# Altium PCB PCB2.PcbDoc
Units mm, origin at the board's own origin, x right, y up, seen from the top; angles counter-clockwise.
Board outline 152.4 x 101.6 mm, 2 copper layers (Top Layer, Bottom Layer); 19 components, 15 nets, 64 pads, 0 vias.
Unrouted connection lines stored in the file: 35.
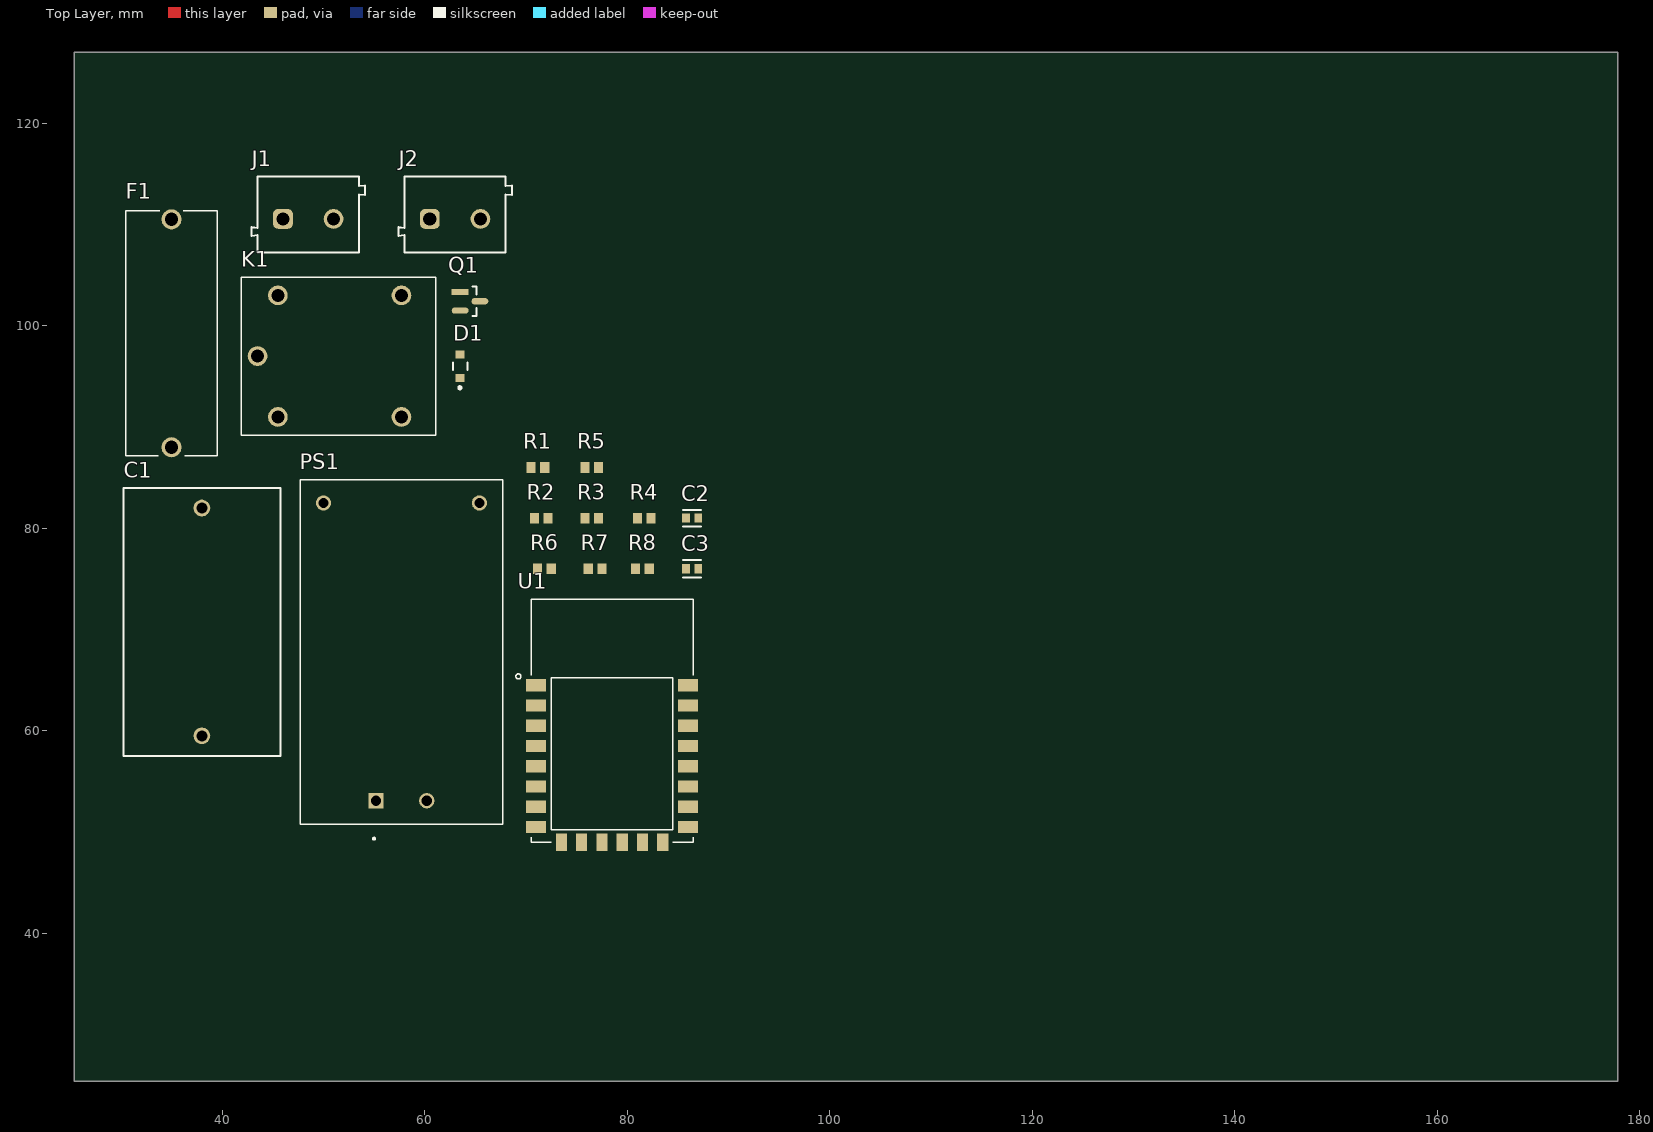
[diagram p0: Top Layer view]
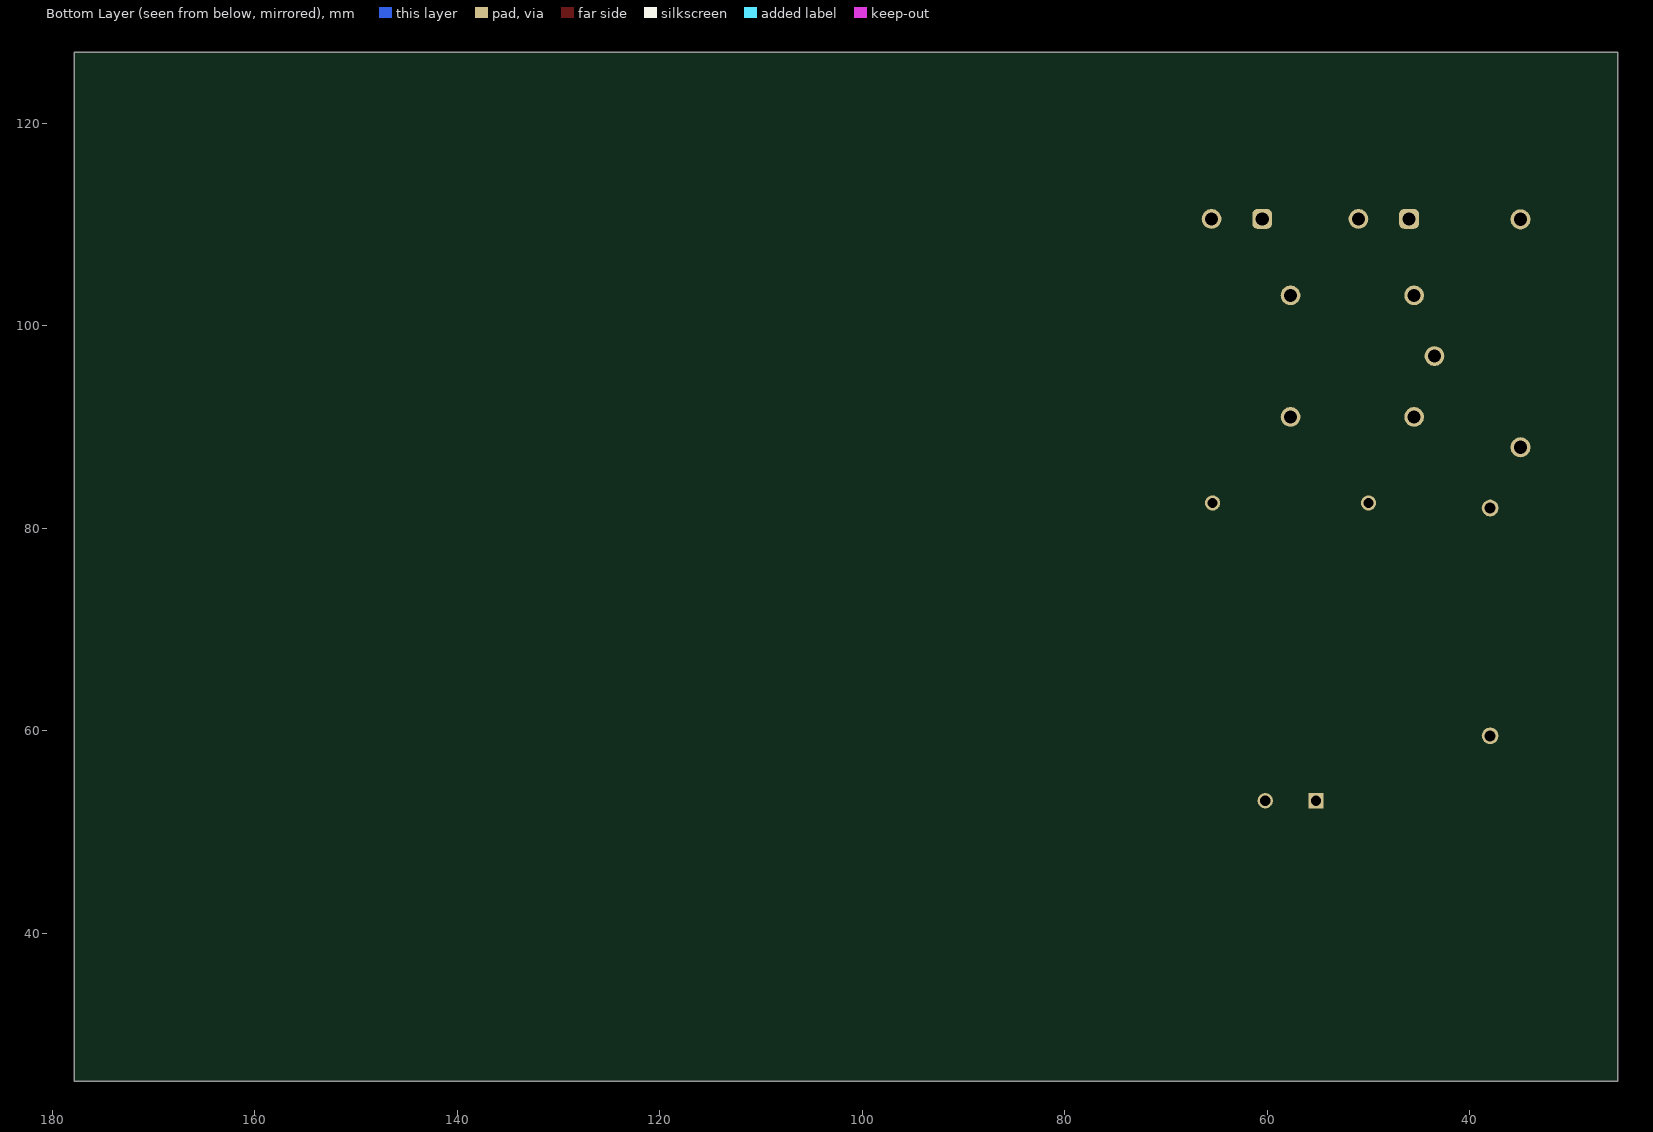
[diagram p1: Bottom Layer view, seen from below]

## Layer stack, top to bottom
Top Solder: solder mask 0.0102, Solder Resist, Dk 3.5
Top Layer: signal copper 0.0356
Dielectric 1: dielectric 0.32, FR-4, Dk 4.8
Bottom Layer: signal copper 0.0356
Bottom Solder: solder mask 0.0102, Solder Resist, Dk 3.5

## Board outline
25.4,25.4 177.8,25.4 177.8,127 25.4,127

## Design rules (kind name [scope] priority, off if disabled: settings)
Clearance [All] p1: gap=0.254 ignorepadtopadclearanceinfootprint=FALSE except(0: Arc-Hole Track-Hole SMDPad-Hole THPad-Hole Via-Hole Fill-Hole Poly-Hole Region-Hole Text-Hole)
PolygonConnect [All] p1: connectstyle=Relief reliefconductorwidth=0.254 reliefentries=4 polygonreliefangle="90 Angle" airgapwidth=0.254
RoutingVias [All] p1: holewidth=0.711 width=1.27 viastyle="Through Hole" minholewidth=0.711 minwidth=1.27 maxholewidth=0.711 maxwidth=1.27
SolderMaskExpansion [All] p1: expansion=0.102 istentingtop=FALSE
Width [All] p1: maxlimit=0.254 minlimit=0.254 preferedwidth=0.254
30 further rules are at their usual default settings.

## Components (designator, comment, footprint, x,y, rotation, side; value= is the part's Value field where it differs from the comment)
C1 "safety capacitor" WCAP-FTX2_L26W15H25 38,70.75 r90 top
C2 "C0603" FP-C0603C106M9PACTU-MFG 86.4,81 r0 top value=10uF
C3 "C0603" FP-C0603C-CF-MFG 86.4,76 r0 top value="0.10 μF"
D1 "1SS404,H3F" FP-SOD-323-MFG 63.5,96 r90 top
F1 "4628" FUSE_4628 35,99.25 r90 top
J1 "input 220v" 691102710002 48.5,111 r0 top
J2 "691102710002" 691102710002 63,111 r0 top
K1 "SRD-03VDC-SL-C" RELAY_SRD-03VDC-SL-C 51.5,97 r0 top
PS1 "HLK-PM03" CONV_HLK-PM03 57.7,67.8 r90 top
Q1 "MMBT2222A-7-F" FP-SOT23-IPC_A 64.477,102.415 r0 top
R1 "10kOhm" RESC1609X50X30ML10T20 71.175,86 r0 top
R2 "10kOhm" RESC1609X50X30ML10T20 71.5,81 r0 top
R3 "10kOhm" RESC1609X50X30ML10T20 76.5,81 r0 top
R4 "10kOhm" RESC1609X50X30ML10T20 81.675,81 r0 top
R5 "10kOhm" RESC1609X50X30ML10T20 76.5,86 r0 top
R6 "10kOhm" RESC1609X50X30ML10T20 71.825,76 r0 top
R7 "1kOhm" RESC1609X50X30ML10T20 76.825,76 r0 top
R8 "10kOhm" RESC1609X50X30ML10T20 81.5,76 r0 top
U1 "ESP8266-12E/ESP-12E" XCVR_ESP8266-12E/ESP-12E 78.5,57.5 r0 top

## Footprints (in the part's own frame and the unit in brackets; to place one, negate y for a bottom-side part, rotate by r counter-clockwise, add the part's x,y. Pads: shape width x height; smd on the part's side, far side on the other; paste and mask are expansions set on the pad)
691102710002 [mm] "5,00mm - modular - blue - Horizontal entry with pressure clamp - 9,9 mm height - 02p"
  rrect50% 1.95x1.95 hole 1.3: 1(-2.5,-0.45)
  round 1.95 hole 1.3: 2(2.5,-0.45)
  silkscreen extent -5.6,-3.75 5.6,3.75, body extent -5.6,-3.75 5.6,3.75, height 9.96
CONV_HLK-PM03 [mm]
  rect 1.508x1.508 hole 1: 1(-14.7,2.5)
  round 1.508 hole 1: 2(-14.7,-2.5) 3(14.7,7.7) 4(14.7,-7.7)
  silkscreen extent -18.55,-10 17,10, body extent -17,-10.1 17,10.1, height 20
FP-C0603C106M9PACTU-MFG [mm]
  rect 0.75x0.9 smd paste+0 mask+0: 1(-0.6,0) 2(0.6,0)
  silkscreen extent -0.88,-0.83 0.87,0.82, body extent -1.2,-0.6 1.2,0.6, height 0.25
FP-C0603C-CF-MFG [mm]
  rect 0.75x0.9 smd paste+0 mask+0: 1(-0.6,0) 2(0.6,0)
  silkscreen extent -0.87,-0.85 0.88,0.85, body extent -1.2,-0.6 1.2,0.6, height 0.25
FP-SOD-323-MFG [mm]
  rect 0.8x0.9 smd paste+0 mask+0: 1(-1.15,0) 2(1.15,0)
  silkscreen extent -2.25,-0.73 0.38,0.73, body extent -1.65,-0.82 1.65,0.82, height 0.25
FP-SOT23-IPC_A [mm]
  rect 1.659x0.627 smd paste+0 mask+0: 1(-0.977,0.915)
  rrect100% 1.659x0.627 smd paste+0 mask+0: 2(-0.977,-0.915) 3(0.977,0)
  silkscreen extent 0.23,-1.45 0.65,1.45, body extent -2.31,-1.95 2.31,1.95, height 0.25
FUSE_4628 [mm]
  round 1.98 hole 1.32: 1(-11.25,0) 2(11.25,0)
  silkscreen extent -12.1,-4.49 12.1,4.49, body extent -12.06,-4.55 12.14,4.45, height 5.2
RELAY_SRD-03VDC-SL-C [mm]
  round 1.95 hole 1.3: COIL1(-6,6) COIL2(-6,-6) COM(-8,0) NC(6.2,6) NO(6.2,-6)
  silkscreen extent -9.6,-7.8 9.6,7.8, body extent -9.6,-7.8 9.6,7.8, height 15.8
RESC1609X50X30ML10T20 [mm] "Chip Resistor, 2-Leads, Body 1.55x0.85mm, IPC Low Density"
  rect 0.9x1.05 smd: 1(-0.675,0) 2(0.675,0)
  body extent -0.82,-0.48 0.82,0.48, height 0.5
WCAP-FTX2_L26W15H25 [mm] "Film Capacitors, 26x15x25mm"
  round 1.65 hole 1.1: 1(-11.25,0) 2(11.25,0)
  silkscreen extent -13.25,-7.75 13.25,7.75, body extent -13,-7.5 13,7.5, height 25.05
XCVR_ESP8266-12E/ESP-12E [mm]
  rect 2x1.2 smd: 1(-7.5,7) 2(-7.5,5) 3(-7.5,3) 4(-7.5,1) 5(-7.5,-1) 6(-7.5,-3) 7(-7.5,-5) 8(-7.5,-7) 15(7.5,-7) 16(7.5,-5) 17(7.5,-3) 18(7.5,-1) 19(7.5,1) 20(7.5,3) 21(7.5,5) 22(7.5,7)
  rect 1.1x1.7 smd: 9(-5,-8.5) 10(-3,-8.5) 11(-1,-8.5) 12(1,-8.5) 13(3,-8.5) 14(5,-8.5)
  silkscreen extent -9.5,-8.5 8,15.5, body extent -8,-8.51 8,15.49, height 3

## Part data
C1: library part CMP-03913-52220353-2, "890324026034 Film Capacitor, Wcap-Ftx2 Series, 2.2 F, 10%, Pp (Polypropylene), 275 Vac Rohs Compliant: Yes", Capacitance=2.2µF, Case/Package=Radial, Dielectric=PP, Max Operating Temperature=105°C, Min Operating Temperature=-40°C, Tolerance=10%, Voltage Rating=275V, Dielectric Material=PP, Height=25mm, Height - Seated (Max)=25.5016mm, Hole Diameter=1.1mm, Lead Pitch=22.5044mm, Length=26mm, Mount="Through Hole", NexarPartId=52220353, Packaging=Bulk, Pin Length=20mm, Pitch=22.5mm, REACH SVHC=Unknown, RoHS=Compliant, Termination="PC Pins", Voltage Rating (AC)=275V, Voltage Rating (DC)=275V, Width=15mm
C2: library part CMP-2006-02285-3, "CAP CER 10UF 6.3V X5R 0603", Capacitance=10uF, Manufacturer=Kemet, Manufacturer Part Number=C0603C106M9PACTU, Temperature="-55°C to +85°C", Temperature Characteristic=X5R, Temperature Coefficient=15%, Temperature Range High=+85°C, Temperature Range Low=-55°C, Tolerance=20%, Voltage Rating=6.3V, Automotive=No, Category=Cap, ComponentLink2Description=Datasheet, ComponentLink2URL=http://www.kemet.com/Lists/ProductCatalog/Attachments/19/KEM_C1006_X5R_SMD.pdf, Device Class L1="Passive Components", Device Class L2=Capacitors, Device Class L3="Ceramic Capacitors", Digikey Description="CAP CER 10UF 6.3V X5R 0603", Height=0.9mm, Ipc Land Pattern Name=CAPC16080X80, Lead Free=Yes, Material=Ceramic, Mouser Description="In a Pack of 10, KEMET 0603 (1608M) 10µF MLCC 6.3V dc ±20% SMD C0603C106M9PACTU", Octopart=https://octopart.com/c0603c106m9pactu-kemet-8375727, Package=C0603C106M9PACTU, RoHS=TRUE
C3: library part CMP-2006-03061-2, "CAP CER 0.1UF 50V X7R 0603", Capacitance="0.10 μF", Manufacturer=KEMET, Manufacturer Part Number=C0603C104K5RACTU, Package=C0603C-CF, Temperature="-55°C to +125°C", Temperature Characteristic=X7R, Temperature Coefficient=30ppm/°C, Temperature Range High=+125°C, Temperature Range Low=-55°C, Tolerance=0.1, Voltage Rating="50 V", Automotive=Yes, Automotive Grade="Grade 1", Category=Cap, ComponentLink2Description=Datasheet, ComponentLink2URL=https://api.kemet.com/component-edge/download/datasheet/C0603C100J5GACAUTO.pdf, Device Class L1="Passive Components", Device Class L2=Capacitors, Device Class L3="Ceramic Capacitors", Digikey Description="CAP CER 0.1UF 50V X7R 0603", Height=0.87mm, Lead Free=Yes, Material=Ceramic, Octopart=https://octopart.com/c0603c104k5ractu-kemet-139244, RoHS=TRUE
D1: library part CMP-35905-000002-1, "DIODE SCHOTTKY 20V 300MA USC", Average Rectified Current=300mA, Case/Package=SOD, Max Operating Temperature=100°C, Max Repetitive Reverse Voltage (Vrrm)=25V, Max Reverse Voltage (DC)=20V, Min Operating Temperature=-40°C, Contact Plating=Tin, Element Configuration=Single, Forward Current=300mA, Mount="Surface Mount", Packaging="Tape and Reel"
F1 K1 PS1: Package=None, Availability=Unavailable, Price=None
  F1: MF="{'manufacturer': u'Keystone'}", MP=4628
  K1: MF="{'manufacturer': u'Songle Relay'}", MP=SRD-03VDC-SL-C
  PS1: MF="{'manufacturer': u'Hi-link'}", MP=HLK-PM03
J1 J2: library part CMP-1502-03258-2, Color=Blue, Current=15A, Max Operating Temperature=105°C, Min Operating Temperature=-40°C, Voltage=300V, Contact Material=Brass, Contact Plating=Tin, Current Rating=15A, Height=13.4mm, Housing Material=Nylon, Lead Pitch=5mm, Length=7.5mm, Mount="Through Hole", NexarPartId=8917706, Number of Contacts=2, Number of Levels=1, Number of Pins=2, Number of Positions Per Level=2, Packaging=Box, Pitch=5.0038mm, Plating=Steel, REACH SVHC=Unknown, RoHS=Compliant, Stripping Length=-6mm, Termination=Screw, Voltage Rating=300V, Width=11.2mm, Wire Gauge (Max)=22AWG, Wire Gauge (Min)=14AWG, Wire/Cable Gauge=22AWG
Q1: library part CMP-1693-00003-4, "TRANS NPN 40V 0.6A SMD SOT23-3", Case/Package=SOT-23, Collector Base Voltage (VCBO)=75V, Collector Emitter Breakdown Voltage=40V, Collector Emitter Saturation Voltage=1V, Continuous Collector Current=600mA, Current=1A, Emitter Base Voltage (VEBO)=6V, Frequency=300MHz, Max Operating Temperature=150°C, Max Power Dissipation=300mW, Min Operating Temperature=-55°C, Package Quantity=3000, Power Dissipation=350mW, Collector Emitter Voltage (VCEO)=40V, Contact Plating=Tin, Current Rating=600mA, Element Configuration=Single, Gain Bandwidth Product=300MHz, Height=1mm, hFE Min=100, Lead Free="Lead Free", Length=3.05mm, Max Breakdown Voltage=40V, Max Collector Current=600mA, Max Frequency=300MHz, Mount="Surface Mount", Number of Elements=1, Number of Pins=3, Packaging="Tape and Reel", Polarity=NPN, Radiation Hardening=No, REACH SVHC="No SVHC", Termination=SMD/SMT, Transition Frequency=300MHz, Voltage=40V, Voltage Rating (DC)=40V, Weight=0.000282oz, Width=1.4mm
R1 R2 R3 R4 R5 R6 R7 R8: library part CMP-2000-03837-1, Manufacturer="Vishay Dale", Part Number=CRCW060310K0FKTB
U1: "ESP-12E WiFi Module", Package=None, Availability=Unavailable, MF="{'manufacturer': u'AI-Thinker'}", MP=ESP8266-12E/ESP-12E, Price=None

## Nets (pads, with @x,y where several pads share a name; then routed paths per layer and width w, separated by ;. In a path a pad name is that pad's centre, name@x,y a point inside that pad or via, vN(x,y) a via of type N, cw(c..) or ccw(c..) an arc to the next point about the centre after c; other vN are vias at no path point)
+3.3: C2.2 C3.1 D1.1 K1.COIL2 PS1.4 R1.1 R2.1 R3.1 R4.1 R5.1 U1.8
GND: C2.1 C3.2 PS1.3 Q1.2 R6.1 R8.1 U1.15
NetC1_1: C1.1 J1.2 K1.COM PS1.1
NetC1_2: C1.2 F1.1 J1.1
NetD1_2: D1.2 K1.COIL1 Q1.3
NetF1_2: F1.2 J2.1 PS1.2
NetJ2_2: J2.2 K1.NO
NetQ1_1: Q1.1 R7.2 R8.2
NetR1_2: R1.2 U1.1
NetR2_2: R2.2 U1.3
NetR3_2: R3.2 U1.18
NetR4_2: R4.2 U1.17
NetR5_2: R5.2 U1.19
NetR6_2: R6.2 U1.16
NetR7_1: R7.1 U1.20
pads on no net: K1.NC U1.2 U1.4 U1.5 U1.6 U1.7 U1.9 U1.10 U1.11 U1.12 U1.13 U1.14 U1.21 U1.22